# Altium PCB DragonFly-Controller.PcbDoc
Units mil, origin at the board's own origin, x right, y up, seen from the top; angles counter-clockwise.
Board outline 4921.26 x 2738.74 mil, 2 copper layers (Top Layer, Bottom Layer); 104 components, 70 nets, 329 pads, 9 vias.
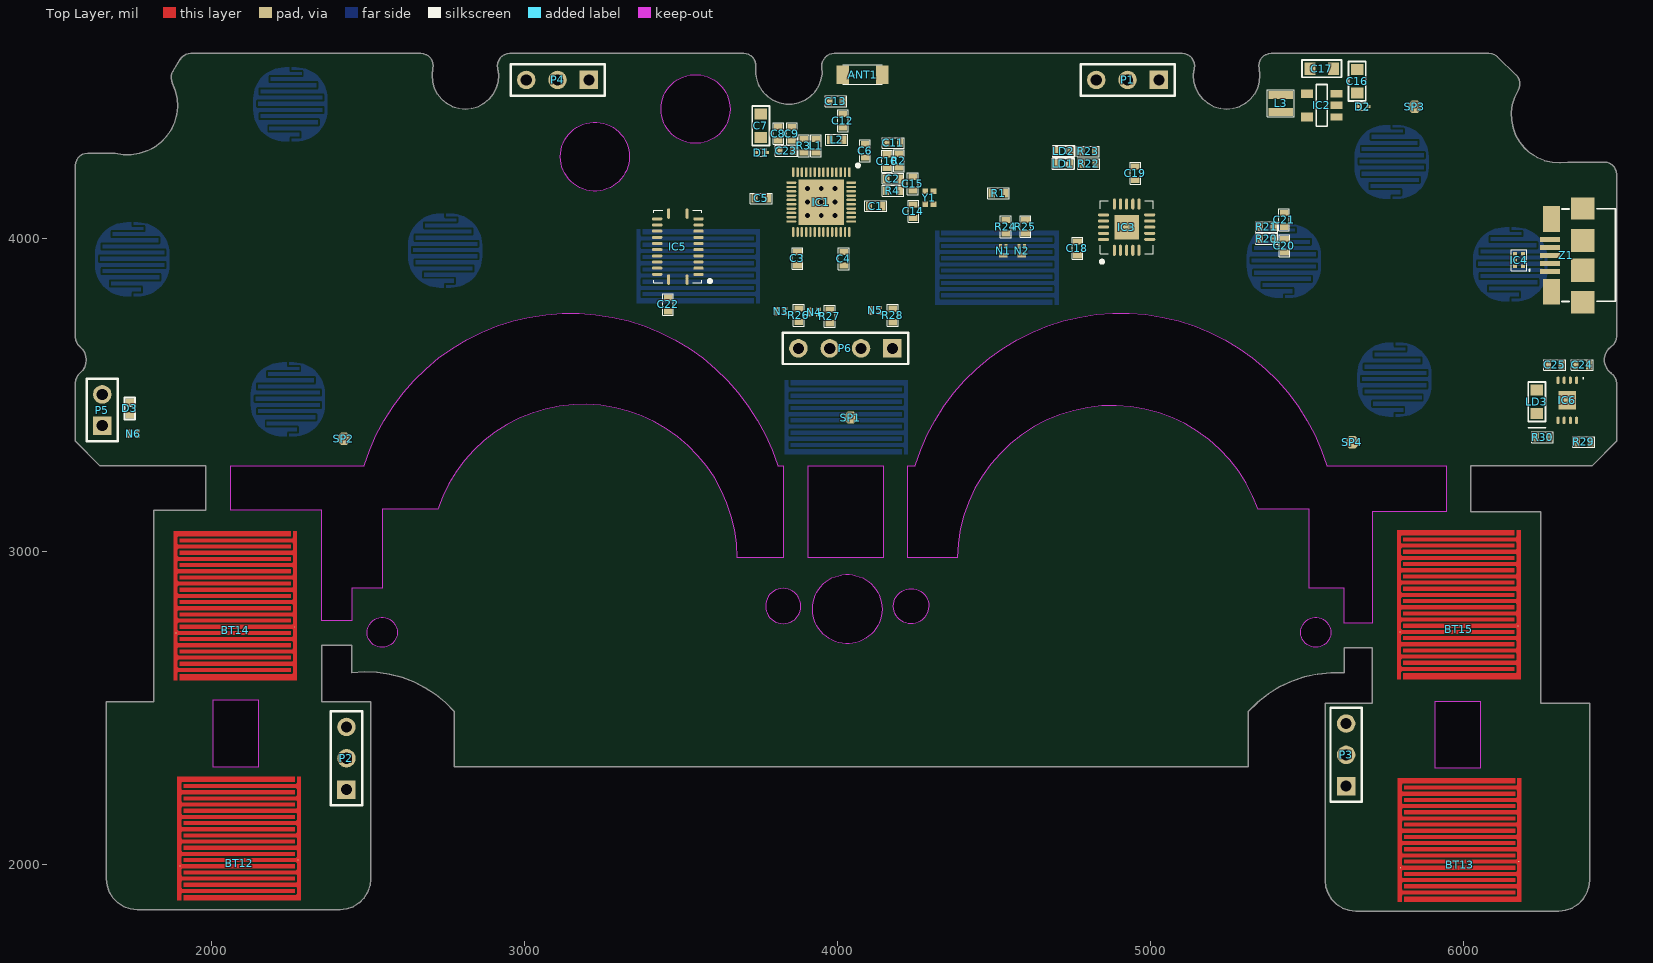
[diagram p0: Top Layer view]
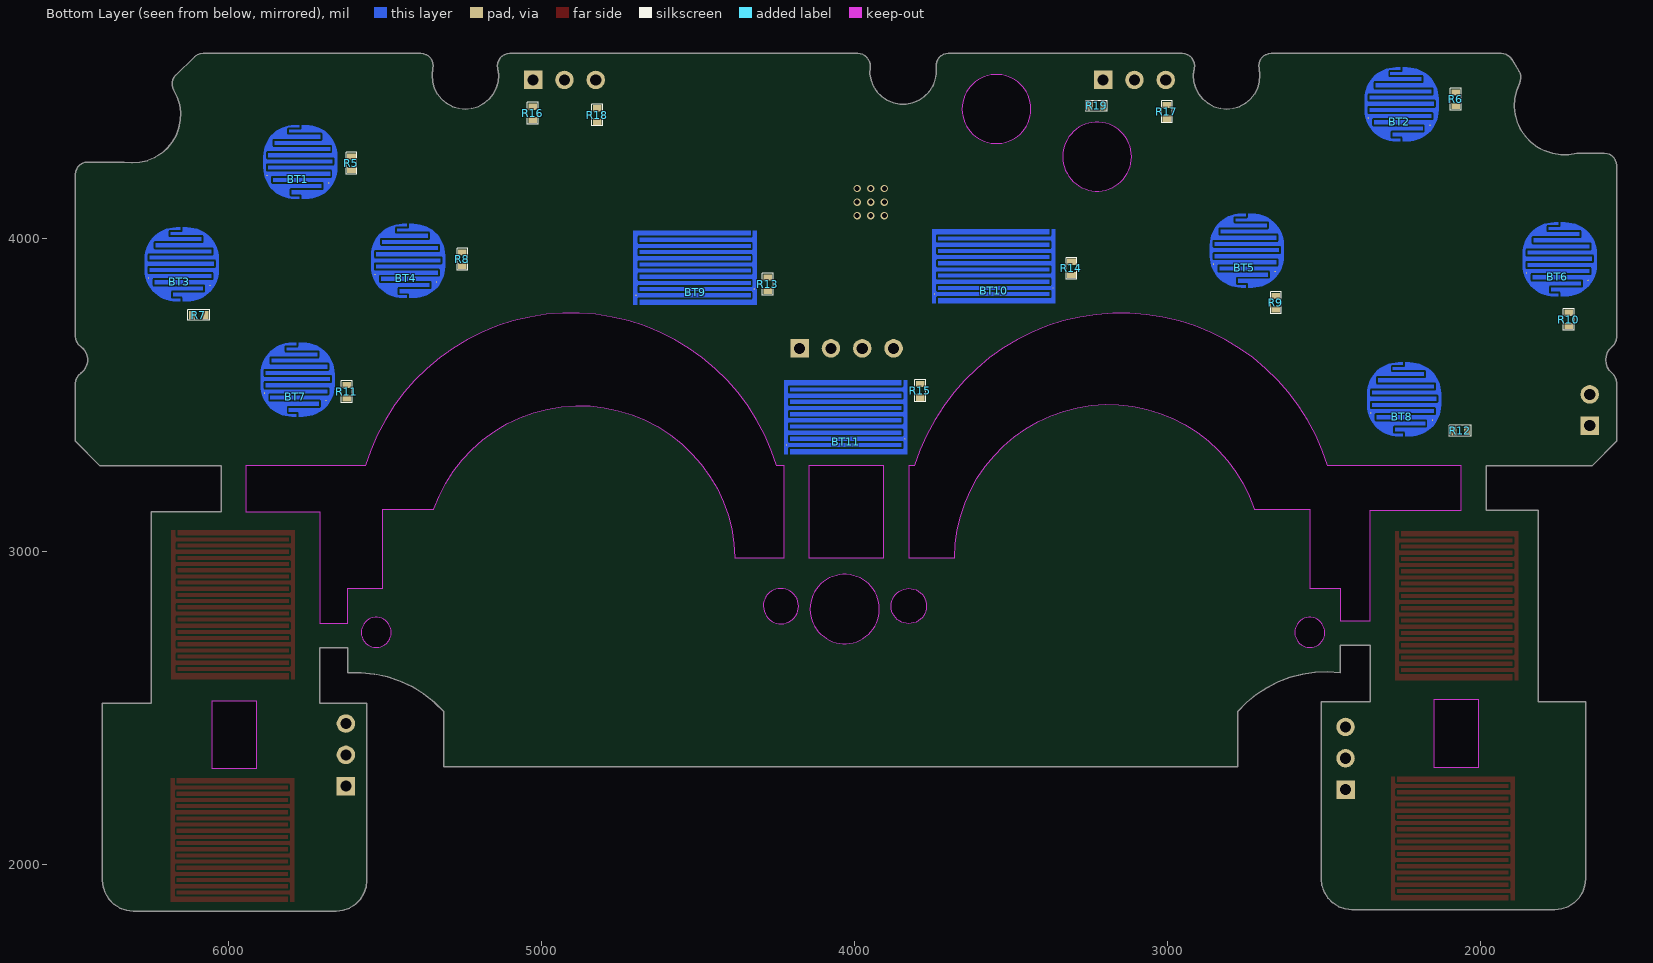
[diagram p1: Bottom Layer view, seen from below]

## Layer stack, top to bottom
Top Solder: solder mask 0.4, Solder Resist, Dk 3.5
Top Layer: signal copper 1.4
Dielectric 1: dielectric 12.6, FR-4, Dk 4.8
Bottom Layer: signal copper 1.4
Bottom Solder: solder mask 0.4, Solder Resist, Dk 3.5

## Board outline
1566.32,3538.23 1566.32,3351.49 1645.06,3272.75 1983.3,3272.75 1983.3,3131.51 1816.04,3131.51 1816.04,2519.2 1665.08,2519.2 1665.08,1954.21 1667.55,1932.31 1674.83,1911.51 1686.56,1892.85 1702.14,1877.26 1720.8,1865.54 1741.61,1858.26 1763.51,1855.79 2411.18,1855.79 2433.09,1858.26 2453.89,1865.54 2472.55,1877.26 2488.14,1892.85 2499.86,1911.51 2507.14,1932.31 2509.61,1954.21 2509.61,2519.2 2353.67,2519.2 2353.67,2699.23 2448.51,2699.23 2448.51,2612.09 2488.96,2614.97 2529.49,2613.46 2569.62,2607.59 2608.88,2597.42 2646.82,2583.07 2682.98,2564.71 2716.95,2542.55 2748.33,2516.85 2776.75,2487.92 2776.75,2311.82 5311.03,2311.82 5311.03,2487.92 5341.46,2517.99 5375.09,2544.44 5411.48,2566.94 5450.17,2585.2 5490.67,2598.99 5532.46,2608.14 5575.02,2612.52 5617.8,2612.09 5617.8,2691.33 5707.56,2691.33 5707.56,2514.51 5556.6,2514.51 5556.6,1949.52 5559.07,1927.62 5566.35,1906.82 5578.07,1888.15 5593.66,1872.57 5612.32,1860.84 5633.12,1853.56 5655.03,1851.1 6302.7,1851.1 6324.61,1853.56 6345.41,1860.84 6364.07,1872.57 6379.66,1888.15 6391.38,1906.82 6398.66,1927.62 6401.13,1949.52 6401.13,2514.51 6245.19,2514.51 6245.19,3126.82 6021.61,3126.82 6021.61,3272.75 6408.84,3272.75 6487.58,3351.49 6487.58,3535.73 6486.44,3545.13 6483.09,3553.98 6477.73,3561.78 6470.66,3568.08 6462.22,3575.39 6455.52,3584.32 6450.88,3594.48 6448.51,3605.39 6448.51,3616.56 6450.88,3627.47 6455.52,3637.63 6462.22,3646.56 6470.66,3653.87 6477.73,3660.17 6483.09,3667.97 6486.44,3676.82 6487.58,3686.22 6487.58,4203.57 6486.59,4212.33 6483.68,4220.65 6478.99,4228.11 6472.76,4234.35 6465.29,4239.04 6456.97,4241.95 6448.21,4242.94 6331.76,4242.94 6306.86,4240.46 6281.88,4242.07 6257.51,4247.73 6234.38,4257.3 6213.12,4270.5 6194.3,4287 6178.42,4306.34 6165.91,4328.02 6157.1,4351.44 6152.23,4375.99 6151.42,4401 6154.71,4425.81 6162,4449.76 6173.09,4472.19 6176.75,4480.18 6178.54,4488.77 6178.38,4497.56 6176.29,4506.09 6172.35,4513.94 6166.77,4520.72 6107.01,4578.72 6098.94,4584.75 6089.59,4588.54 6079.59,4589.83 5384.28,4589.83 5375.52,4588.85 5367.19,4585.93 5359.72,4581.24 5353.49,4575 5348.8,4567.52 5345.89,4559.2 5344.91,4550.43 5345.91,4541.67 5348.56,4520.67 5346.99,4499.57 5341.28,4479.2 5331.64,4460.36 5318.45,4443.81 5302.25,4430.21 5283.67,4420.08 5263.45,4413.84 5242.4,4411.73 5221.34,4413.84 5201.12,4420.08 5182.54,4430.21 5166.34,4443.81 5153.16,4460.36 5143.51,4479.2 5137.8,4499.57 5136.24,4520.67 5138.89,4541.67 5139.88,4550.43 5138.9,4559.2 5135.99,4567.52 5131.3,4575 5125.07,4581.24 5117.6,4585.93 5109.28,4588.85 5100.51,4589.83 3989.42,4589.83 3981.17,4588.96 3973.3,4586.38 3966.13,4582.21 3960,4576.63 3955.18,4569.89 3951.87,4562.29 3950.22,4554.17 3950.32,4545.88 3950.68,4524.84 3946.89,4504.13 3939.09,4484.58 3927.59,4466.95 3912.84,4451.94 3895.41,4440.13 3876,4431.99 3855.37,4427.84 3834.32,4427.84 3813.68,4431.99 3794.27,4440.13 3776.85,4451.94 3762.09,4466.95 3750.59,4484.58 3742.79,4504.13 3739,4524.84 3739.37,4545.88 3739.46,4554.17 3737.82,4562.29 3734.51,4569.89 3729.68,4576.63 3723.55,4582.21 3716.38,4586.38 3708.51,4588.96 3700.26,4589.83 2953.39,4589.83 2944.62,4588.85 2936.3,4585.93 2928.83,4581.24 2922.6,4575 2917.91,4567.52 2915,4559.2 2914.02,4550.43 2915.01,4541.67 2917.67,4520.67 2916.1,4499.57 2910.39,4479.2 2900.74,4460.36 2887.56,4443.81 2871.36,4430.21 2852.78,4420.08 2832.56,4413.84 2811.5,4411.73 2790.45,4413.84 2770.23,4420.08 2751.65,4430.21 2735.45,4443.81 2722.26,4460.36 2712.62,4479.2 2706.91,4499.57 2705.34,4520.67 2707.99,4541.67 2708.99,4550.43 2708.01,4559.2 2705.1,4567.52 2700.41,4575 2694.18,4581.24 2686.71,4585.93 2678.39,4588.85 2669.62,4589.83 1934.94,4589.83 1927,4589.02 1919.38,4586.63 1912.4,4582.75 1906.35,4577.54 1901.48,4571.21 1878.11,4533.52 1874.61,4526.34 1872.63,4518.61 1872.26,4510.64 1873.49,4502.76 1876.29,4495.28 1885.87,4471.2 1891.41,4445.88 1892.75,4419.99 1889.86,4394.23 1882.82,4369.29 1871.81,4345.82 1857.14,4324.45 1839.18,4305.76 1818.42,4290.24 1795.42,4278.3 1770.78,4270.26 1745.15,4266.33 1719.24,4266.63 1693.71,4271.14 1605.69,4271.14 1596.93,4270.15 1588.61,4267.24 1581.14,4262.55 1574.91,4256.32 1570.22,4248.85 1567.31,4240.53 1566.32,4231.77 1566.32,3683.72 1567.29,3675.04 1570.15,3666.78 1574.76,3659.36 1580.9,3653.14 1589.35,3644.56 1595.71,3634.33 1599.66,3622.95 1600.99,3610.98 1599.66,3599 1595.71,3587.62 1589.35,3577.39 1580.9,3568.81 1574.76,3562.59 1570.15,3555.17 1567.29,3546.92
cut-out: 3808.28,3272.75 3826.93,3272.75 3826.93,2980.09 3679.82,2980.09 3677.59,3024.61 3671.32,3068.74 3661.09,3112.13 3646.96,3154.4 3629.06,3195.22 3607.53,3234.25 3582.55,3271.17 3554.33,3305.67 3523.1,3337.47 3489.11,3366.32 3452.65,3391.96 3414.02,3414.19 3373.53,3432.82 3331.51,3447.71 3288.32,3458.73 3244.31,3465.79 3199.84,3468.83 3155.28,3467.83 3110.99,3462.79 3067.34,3453.76 3024.69,3440.81 2983.39,3424.05 2943.78,3403.61 2906.18,3379.67 2870.91,3352.41 2838.25,3322.07 2808.48,3288.9 2781.84,3253.16 2758.55,3215.16 2738.8,3175.2 2722.75,3133.62 2545.91,3133.62 2545.91,2882 2448.51,2882 2448.51,2777.97 2353.67,2777.97 2353.67,3131.51 2062.04,3131.51 2062.04,3272.75 2488.37,3272.75 2505.93,3323.02 2527.32,3371.79 2552.4,3418.77 2581.03,3463.68 2613.04,3506.24 2648.23,3546.21 2686.4,3583.35 2727.32,3617.43 2770.75,3648.26 2816.42,3675.65 2864.07,3699.44 2913.41,3719.48 2964.14,3735.66 3015.98,3747.88 3068.6,3756.07 3121.7,3760.17 3174.95,3760.17 3228.05,3756.07 3280.67,3747.88 3332.51,3735.66 3383.24,3719.48 3432.58,3699.44 3480.23,3675.65 3525.9,3648.26 3569.33,3617.43 3610.25,3583.35 3648.42,3546.21 3683.61,3506.24 3715.62,3463.68 3744.25,3418.77 3769.33,3371.79 3790.72,3323.02
cut-out: 5562.04,3272.75 5942.87,3272.75 5942.87,3126.82 5707.56,3126.82 5707.56,2770.07 5617.8,2770.07 5617.8,2882 5506.71,2882 5506.71,3133.62 5343.25,3133.62 5326.11,3176.21 5305.1,3217.03 5280.39,3255.72 5252.2,3291.96 5220.77,3325.43 5186.37,3355.83 5149.3,3382.92 5109.88,3406.45 5068.45,3426.23 5025.36,3442.08 4980.99,3453.86 4935.71,3461.48 4889.93,3464.86 4844.02,3463.99 4798.4,3458.86 4753.45,3449.52 4709.56,3436.06 4667.1,3418.58 4626.45,3397.24 4587.96,3372.22 4551.95,3343.74 4518.74,3312.04 4488.6,3277.4 4461.82,3240.12 4438.6,3200.51 4419.16,3158.92 4403.66,3115.71 4392.23,3071.24 4384.98,3025.91 4381.96,2980.09 4224.07,2980.09 4224.07,3272.75 4248.16,3272.75 4265.45,3322.99 4286.58,3371.74 4311.41,3418.71 4339.81,3463.62 4371.59,3506.2 4406.58,3546.19 4444.55,3583.36 4485.29,3617.47 4528.54,3648.33 4574.06,3675.75 4621.56,3699.56 4670.75,3719.63 4721.36,3735.83 4773.06,3748.07 4825.56,3756.27 4878.53,3760.38 4931.67,3760.38 4984.64,3756.27 5037.14,3748.07 5088.85,3735.83 5139.45,3719.63 5188.65,3699.56 5236.15,3675.75 5281.66,3648.33 5324.91,3617.47 5365.65,3583.36 5403.62,3546.19 5438.61,3506.2 5470.39,3463.62 5498.79,3418.71 5523.63,3371.74 5544.75,3322.99
cut-out: 3905.67,3272.75 4145.33,3272.75 4145.33,2980.09 3905.67,2980.09
cut-out: 2150,2525.18 2150,2310.82 2006.22,2310.82 2006.22,2525.18
cut-out: 5909,2306.63 5909,2521 6052.78,2521 6052.78,2306.63
cut-out: 3115,4260 cw(c3225,4260.11) 3335,4260 cw(c3225,4260)
cut-out: 3436.57,4412.13 cw(c3546.57,4412.24) 3656.57,4412.13 cw(c3546.57,4412.13)
cut-out: 5478.89,2740 cw(c5526.89,2740.99) 5574.89,2740 cw(c5526.89,2740.97)
cut-out: 2498,2740 cw(c2546,2740.99) 2594,2740 cw(c2546,2740.97)
cut-out: 3770,2825 ccw(c3826.51,2825.49) 3883,2824 ccw(c3826.5,2824.87)
cut-out: 3920,2815 cw(c4031,2815.16) 4142,2815 cw(c4031,2815.99)
cut-out: 4178.15,2824.71 cw(c4234.65,2824.58) 4291.15,2823.71 cw(c4234.66,2825.2)

## Design rules (kind name [scope] priority, off if disabled: settings)
Clearance [All] p1: gap=3.5 ignorepadtopadclearanceinfootprint=FALSE
DiffPairsRouting [All] p1: maxlimit=10 minlimit=10 mostfreqgap=10 toplayer_minwidth=15 toplayer_maxwidth=15 toplayer_prefwidth=15 bottomlayer_minwidth=15 bottomlayer_maxwidth=15 bottomlayer_prefwidth=15 maxuncoupledlength=500
PlaneConnect [All] p1: planeconnectstyle=Direct reliefexpansion=20 reliefentries=4 reliefconductorwidth=10 reliefairgap=10
PolygonConnect [All] p1: connectstyle=Direct reliefconductorwidth=10 reliefentries=4 polygonreliefangle="90 Angle" airgapwidth=10
RoutingVias [All] p1: holewidth=11.81 width=19.68 viastyle="Through Hole" minholewidth=7.87 minwidth=15.75 maxholewidth=196.85 maxwidth=236.22
SolderMaskExpansion [All] p1: expansion=4
Width [All] p1: maxlimit=200 minlimit=3.5 preferedwidth=5
28 further rules are at their usual default settings.

## Classes and differential pairs
net class UART: U0RXD U0TXD
component class "[06] - Multiplexer": C22 IC5
component class "[05] - Motor and LEDs": D3 N3 N4 N5 N6 P5 P6 R26 R27 R28
component class "[04] - USB": C18 C19 C20 C21 IC3 IC4 LD1 LD2 N1 N2 R20 R21 R22 R23 R24 R25 Z1
component class "[03] - Power": C16 C17 C24 C25 D2 IC2 IC6 L3 LD3 R29 R30 SP3 SP4
component class "[02] - Buttons": BT1 BT2 BT3 BT4 BT5 BT6 BT7 BT8 BT9 BT10 BT11 BT12 BT13 BT14 BT15 P1 P2 P3 P4 R5 R6 R7 R8 R9 R10 R11 R12 R13 R14 R15 R16 R17 R18 R19
component class "[01] - MCU": ANT1 C1 C2 C3 C4 C5 C6 C7 C8 C9 C10 C11 C12 C13 C14 C15 C23 D1 IC1 L1 L2 R1 R2 R3 R4 SP1 SP2 Y1
differential pair D: +D_P -D_N

## Components (designator, comment, footprint, x,y, rotation, side; value= is the part's Value field where it differs from the comment)
ANT1 "2.4 GHz Ant" 2450AT18A100E 4080,4522 r0 top
BT1 "" PCB_button_6mm_round 5769,4243 r180 bottom
BT2 "" PCB_button_6mm_round 2253,4427 r180 bottom
BT3 "" PCB_button_6mm_round 6148,3916 r180 bottom
BT4 "" PCB_button_6mm_round 5425,3927 r180 bottom
BT5 "" PCB_button_6mm_round 2747,3960 r180 bottom
BT6 "" PCB_button_6mm_round 1748,3932 r180 bottom
BT7 "" PCB_button_6mm_round 5778,3548 r180 bottom
BT8 "" PCB_button_6mm_round 2245,3485 r180 bottom
BT9 "" PCB_button_10x6mm_rect 4509,3906 r180 bottom
BT10 "" PCB_button_10x6mm_rect 3555,3910 r180 bottom
BT11 "" PCB_button_10x6mm_rect 4028,3428 r180 bottom
BT12 "" PCB_button_10x10mm_rect 2089,2083 r0 top
BT13 "" PCB_button_10x10mm_rect 5986,2078 r0 top
BT14 "" PCB_BUTTON_12X10MM_RECT 2077,2828 r0 top
BT15 "" PCB_BUTTON_12X10MM_RECT 5984,2831 r0 top
C1 "Capacitor" "0402 - Capacitor" 4122,4102 r0 top value=100p
C2 "Capacitor" "0402 - Capacitor" 4177,4190 r0 top value=1u
C3 "Capacitor" "0402 - Capacitor" 3872,3935 r270 top value=0.1u
C4 "Capacitor" "0402 - Capacitor" 4020,3934 r270 top value=0.1u
C5 "Capacitor" "0402 - Capacitor" 3756,4127 r180 top value=1u
C6 "Capacitor" "0402 - Capacitor" 4088,4279 r90 top value=0.1u
C7 "Capacitor" "0603 - Capacitor" 3755,4359 r270 top value=10u
C8 "Capacitor" "0402 - Capacitor" 3811,4334 r90 top value=1u
C9 "Capacitor" "0402 - Capacitor" 3854,4333 r90 top value=0.1u
C10 "Capacitor" "0402 - Capacitor" 4158,4246 r270 top value="3.3n 10%"
C11 "Capacitor" "0402 - Capacitor" 4178,4304 r0 top value="10n 10%"
C12 "Capacitor" "0402 - Capacitor" 4017,4375 r90 top value=4.7p
C13 "Capacitor" "0402 - Capacitor" 3995,4437 r180 top value=2.4p
C14 "Capacitor" "0402 - Capacitor" 4242,4086 r270 top value=22p
C15 "Capacitor" "0402 - Capacitor" 4240,4174 r90 top value=22p
C16 "Capacitor" "0603 - Capacitor" 5659,4501 r270 top value=4.7u
C17 "Capacitor" "0603 - Capacitor" 5546,4541 r180 top value=10u
C18 "Capacitor" "0402 - Capacitor" 4766,3967 r270 top value=1u
C19 "Capacitor" "0402 - Capacitor" 4951,4207 r90 top value=1u
C20 "Capacitor" "0402 - Capacitor" 5427,3976 r270 top value=47p
C21 "Capacitor" "0402 - Capacitor" 5426,4058 r90 top value=47p
C22 "Capacitor" "0402 - Capacitor" 3459,3788 r270 top value=100n
C23 "Capacitor" "0402 - Capacitor" 3836,4279 r180 top value=0.1u
C24 "Capacitor" "0402 - Capacitor" 6378,3595 r0 top value=4.7u
C25 "Capacitor" "0402 - Capacitor" 6290,3595 r180 top value=4.7u
D1 "Diode" "SOD 923" 3757,4273 r0 top
D2 "Diode" "SOD 923" 5677.46,4420 r180 top
D3 "Diode" "0402 - Led" 1740,3456 r270 top
IC1 "ESP32-D2WD" "ESP32 QFN35P500X500X90_HS-49N" 3948,4115 r270 top
IC2 "LM3671" "SOT 23 - 5" 5548,4424 r270 top
IC3 "FT231X" QFN20-127P600-8N 4923,4035 r90 top
IC4 "PRTR5V0U2F" SOT886 6176,3930 r180 top
IC5 "74HC4067" 74HC4067-QFN50P350X550X100_HS-25N 3490,3973 r180 top
IC6 "MCP73831T" QFN50P300X200X100_HS-9N 6330,3482 r270 top
L1 "Inductor" "0402 - inductor" 3931,4295 r90 top value=2n
L2 "Inductor" "0402 - inductor" 3997,4314 r180 top value=2.4n
L3 "Inductor" MDMK2020 5415,4430 r90 top value=2.2u
LD1 "Led" "0402 - Led" 4721,4237 r180 top
LD2 "Led" "0402 - Led" 4722,4277 r180 top
LD3 "Led" "0603 - led" 6233,3477 r270 top
N1 "N-MOSFET" DFN1006-3 4529,3959 r90 top
N2 "N-MOSFET" DFN1006-3 4588,3960 r90 top
N3 "N-MOSFET" DFN1006-3 3818,3767 r0 top
N4 "N-MOSFET" DFN1006-3 3926,3764 r0 top
N5 "N-MOSFET" DFN1006-3 4121,3769 r0 top
N6 "N-MOSFET" DFN1006-3 1751,3375 r0 top
P1 "Header 3" HDR1X3 5026,4505 r180 top
P2 "Header 3" HDR1X3 2432,2239 r90 top
P3 "Header 3" HDR1X3 5624,2250 r90 top
P4 "Header 3" HDR1X3 3206,4505 r180 top
P5 "Motor" HDR1X2 1652,3401 r90 top
P6 "RGB Led" HDR1X4 4175,3648 r180 top
R1 "Resistor" "0402 - Resistor" 4514,4143 r0 top value=499
R2 "Resistor" "0402 - Resistor" 4196,4247 r270 top value=20k
R3 "Resistor" "0402 - Resistor" 3892,4295 r90 top value=10k
R4 "Resistor" "0402 - Resistor" 4177,4151 r180 top value=0
R5 "Resistor" "0402 - Resistor" 5606,4239 r90 bottom value=1M
R6 "Resistor" "0402 - Resistor" 2080,4443 r270 bottom value=1M
R7 "Resistor" "0402 - Resistor" 6094,3754 r0 bottom value=1M
R8 "Resistor" "0402 - Resistor" 5252,3932 r90 bottom value=1M
R9 "Resistor" "0402 - Resistor" 2654,3794 r270 bottom value=1M
R10 "Resistor" "0402 - Resistor" 1719,3740 r270 bottom value=1M
R11 "Resistor" "0402 - Resistor" 5621,3509 r90 bottom value=1M
R12 "Resistor" "0402 - Resistor" 2066,3385 r0 bottom value=1M
R13 "Resistor" "0402 - Resistor" 4277,3853 r90 bottom value=1M
R14 "Resistor" "0402 - Resistor" 3307,3903 r90 bottom value=1M
R15 "Resistor" "0402 - Resistor" 3790,3512 r90 bottom value=1M
R16 "Resistor" "0402 - Resistor" 5027,4398 r90 bottom value=1M
R17 "Resistor" "0402 - Resistor" 3002,4403 r90 bottom value=1M
R18 "Resistor" "0402 - Resistor" 4821,4393 r270 bottom value=1M
R19 "Resistor" "0402 - Resistor" 3227,4422 r0 bottom value=1M
R20 "Resistor" "0402 - Resistor" 5371,3998 r0 top value=27
R21 "Resistor" "0402 - Resistor" 5371,4036 r0 top value=27
R22 "Resistor" "0402 - Resistor" 4802,4237 r0 top value=2k
R23 "Resistor" "0402 - Resistor" 4801,4277 r0 top value=2k
R24 "Resistor" "0402 - Resistor" 4537,4036 r90 top value=10k
R25 "Resistor" "0402 - Resistor" 4600,4037 r270 top value=10k
R26 "Resistor" "0402 - Resistor" 3876,3754 r270 top value=100
R27 "Resistor" "0402 - Resistor" 3975,3750 r270 top value=475
R28 "Resistor" "0402 - Resistor" 4176,3753 r270 top value=100
R29 "Resistor" "0402 - Resistor" 6382,3349 r0 top value=2k
R30 "Resistor" "0402 - Resistor" 6251,3364 r0 top value=1k
SP1 "Signal Point" Signal_point_1mm 4042,3427 r90 top value=DNP
SP2 "Signal Point" Signal_point_1mm 2424,3359 r90 top value=DNP
SP3 "Signal Point" Signal_point_1mm 5843,4419 r90 top value=DNP
SP4 "Signal Point" Signal_point_1mm 5644,3348 r90 top value=DNP
Y1 "XTAL_4" "XTAL 1.6X1.2MM 4-SMD" 4293,4129 r90 top value="40 MHz"
Z1 "USB MICROB" "USB - microB" 6380,3945 r90 top

## Footprints (in the part's own frame and the unit in brackets; to place one, negate y for a bottom-side part, rotate by r counter-clockwise, add the part's x,y. Pads: shape width x height; smd on the part's side, far side on the other; paste and mask are expansions set on the pad)
74HC4067-QFN50P350X550X100_HS-25N [mm] "QFN, 24-Leads, Body 3,50x5,50mm, Pitch 1,50mm/0,50mm, Thermal Pad 2,10x4,10mm, IPC Medium Density"
  oval 0.25x0.85 smd: 1(-0.75,2.675) 12(-0.75,-2.675) 13(0.75,-2.675) 24(0.75,2.675)
  oval 0.85x0.25 smd: 2(-1.675,2.25) 3(-1.675,1.75) 4(-1.675,1.25) 5(-1.675,0.75) 6(-1.675,0.25) 7(-1.675,-0.25) 8(-1.675,-0.75) 9(-1.675,-1.25) 10(-1.675,-1.75) 11(-1.675,-2.25) 14(1.675,-2.25) 15(1.675,-1.75) 16(1.675,-1.25) 17(1.675,-0.75) 18(1.675,-0.25) 19(1.675,0.25) 20(1.675,0.75) 21(1.675,1.25) 22(1.675,1.75) 23(1.675,2.25)
  silkscreen extent -2.73,-2.95 1.95,2.95, body extent -1.8,-2.8 1.81,2.81, height 1
"0402 - Capacitor" [mm]
  rect 0.5x0.7 smd: 1(0.55,0) 2(-0.55,0)
  silkscreen extent -0.89,-0.43 0.89,0.43, body extent -0.52,-0.27 0.53,0.28, height 0.55
"0402 - inductor" [mm]
  rect 0.5x0.7 smd: 1(0.55,0) 2(-0.55,0)
  silkscreen extent -0.89,-0.43 0.89,0.43, body extent -0.5,-0.3 0.5,0.3, height 0.2
"0402 - Led" [mm]
  rect 0.5x0.7 smd: 1(0.55,0) 2(-0.55,0)
  silkscreen extent -0.89,-0.43 0.89,0.43, body extent -0.5,-0.25 0.5,0.25, height 0.16
"0402 - Resistor" [mm]
  rect 0.5x0.7 smd: 1(0.55,0) 2(-0.55,0)
  silkscreen extent -0.89,-0.43 0.89,0.43, body extent -0.53,-0.28 0.53,0.28, height 0.4
"0603 - Capacitor" [mm]
  rect 0.9x1 smd: 1(-0.95,0) 2(0.95,0)
  silkscreen extent -1.6,-0.7 1.6,0.7, body extent -0.85,-0.45 0.85,0.45, height 0.9
"0603 - led" [mm]
  rect 0.9x1 smd: 1(-0.95,0) 2(0.95,0)
  silkscreen extent -1.6,-0.7 2.1,0.7, body extent -0.8,-0.39 0.8,0.39, height 0.7
2450AT18A100E [mm]
  rect 1x1.5 smd: 1(-1.6,0) 2(1.6,0)
  silkscreen extent -1.6,-0.8 1.6,0.8, body extent -1.8,-0.5 1.8,0.5, height 1
DFN1006-3 [mm]
  rect 0.4x0.25 smd: 1(0.35,0.225) 2(0.35,-0.225)
  rect 0.4x0.7 smd: 3(-0.35,0)
  body extent -0.52,-0.32 0.53,0.33, height 0.4
"ESP32 QFN35P500X500X90_HS-49N" [mm] "QFN, 48-Leads, Body 5,00x5,00mm, Pitch 0,35mm, Thermal Pad 3,70x3,70mm, IPC Medium Density"
  oval 0.8x0.2 smd: 1(-2.425,2.275) 2(-2.425,1.925) 3(-2.425,1.575) 4(-2.425,1.225) 5(-2.425,0.875) 6(-2.425,0.525) 7(-2.425,0.175) 8(-2.425,-0.175) 9(-2.425,-0.525) 10(-2.425,-0.875) 11(-2.425,-1.225) 12(-2.425,-1.575) 13(-2.425,-1.925) 14(-2.425,-2.275) 25(2.425,-2.275) 26(2.425,-1.925) 27(2.425,-1.575) 28(2.425,-1.225) 29(2.425,-0.875) 30(2.425,-0.525) 31(2.425,-0.175) 32(2.425,0.175) 33(2.425,0.525) 34(2.425,0.875) 35(2.425,1.225) 36(2.425,1.575) 37(2.425,1.925) 38(2.425,2.275)
  oval 0.2x0.8 smd: 15(-1.575,-2.425) 16(-1.225,-2.425) 17(-0.875,-2.425) 18(-0.525,-2.425) 19(-0.175,-2.425) 20(0.175,-2.425) 21(0.525,-2.425) 22(0.875,-2.425) 23(1.225,-2.425) 24(1.575,-2.425) 39(1.575,2.425) 40(1.225,2.425) 41(0.875,2.425) 42(0.525,2.425) 43(0.175,2.425) 44(-0.175,2.425) 45(-0.525,2.425) 46(-0.875,2.425) 47(-1.225,2.425) 48(-1.575,2.425)
  rect 3.7x3.7 smd paste-5: 49(0,0)
  silkscreen extent -3.1,2.85 -2.85,3.1, body extent -2.53,-2.53 2.53,2.53, height 0.9
HDR1X2 [mm] "Connector; Header; 2 Position"
  rect 1.5x1.5 hole 0.9: 1(0,0)
  round 1.5 hole 0.9: 2(2.54,0)
  silkscreen extent -1.27,-1.27 3.81,1.27
HDR1X3 [mm] "Connector; Header; 3 Position"
  rect 1.5x1.5 hole 0.9: 1(0,0)
  round 1.5 hole 0.9: 2(2.54,0) 3(5.08,0)
  silkscreen extent -1.27,-1.27 6.35,1.27
HDR1X4 [mm] "Connector; Header; 4 Position"
  rect 1.5x1.5 hole 0.9: 1(0,0)
  round 1.5 hole 0.9: 2(2.54,0) 3(5.08,0) 4(7.62,0)
  silkscreen extent -1.27,-1.27 8.89,1.27
MDMK2020 [mm] "Inductor"
  rect 0.65x2 smd: 1(-0.675,0) 2(0.675,0)
  silkscreen extent -1.09,-1.09 1.09,1.09, body extent -1,-1 1,1, height 1.2
PCB_button_6mm_round [mm]
  round 0.1 smd mask+0.05: 1(-2.7,-1.1) 2(2.3,-1.7)
  Top Layer region: -0.1,3 -0.46,3 -1.432,2.807 -2.256,2.256 -2.807,1.432 -3,0.46 -3,0.46 -3,-0.46 -2.807,-1.432 -2.256,-2.256 -1.432,-2.807 -0.46,-3 -0.46,-3 -0.1,-3 -0.1,-2.8 -0.8,-2.8 -0.9,-2.7 -0.9,-2.2 -0.8,-2.1 1.7,-2.1 1.7,-1.8 -2.3,-1.8 -2.4,-1.7 -2.4,-1.201 -2.3,-1.1 2.4,-1.1 2.4,-0.8 -2.7,-0.8 -2.8,-0.7 -2.8,-0.2 -2.7,-0.1 2.6,-0.1 2.6,0.2 -2.7,0.2 -2.8,0.3 -2.8,0.8 -2.7,0.9 2.4,0.9 2.4,1.2 -2.2,1.2 -2.3,1.3 -2.3,1.8 -2.2,1.9 1.6,1.9 1.6,2.2 -1,2.2 -1.1,2.3 -1.1,2.7 -1,2.8 -0.1,2.8
  Top Layer region: 0.1,3 0.46,3 1.432,2.807 2.256,2.256 2.807,1.432 3,0.46 3,0.46 3,-0.46 2.807,-1.432 2.256,-2.256 1.432,-2.807 0.46,-3 0.46,-3 0.1,-3 0.1,-2.7 0,-2.6 -0.7,-2.6 -0.7,-2.3 1.8,-2.3 1.9,-2.2 1.9,-1.7 1.8,-1.6 -2.2,-1.6 -2.2,-1.3 2.5,-1.3 2.6,-1.201 2.6,-0.7 2.5,-0.6 -2.6,-0.6 -2.6,-0.3 2.7,-0.3 2.8,-0.2 2.8,0.3 2.7,0.4 -2.6,0.4 -2.6,0.7 2.5,0.7 2.6,0.8 2.6,1.3 2.5,1.4 -2.1,1.4 -2.1,1.7 1.7,1.7 1.8,1.8 1.8,2.3 1.7,2.4 -0.9,2.4 -0.9,2.6 0,2.6 0.1,2.7
PCB_button_10x6mm_rect [mm]
  round 0.1 smd mask+0.05: 1(-4.8,-2.25) 2(4.8,-1.75)
  Top Layer region: -4.5,-3 -4.5,-2.6 4.6,-2.6 4.7,-2.5 4.7,-2 4.6,-1.9 -4.5,-1.9 -4.5,-1.6 4.6,-1.6 4.7,-1.5 4.7,-1 4.6,-0.9 -4.5,-0.9 -4.5,-0.6 4.6,-0.6 4.7,-0.5 4.7,0 4.6,0.1 -4.5,0.1 -4.5,0.4 4.6,0.4 4.7,0.5 4.7,1 4.6,1.1 -4.5,1.1 -4.5,1.4 4.6,1.4 4.7,1.5 4.7,2 4.6,2.1 -4.5,2.1 -4.5,2.4 4.6,2.4 4.7,2.5 4.7,3 5,3 5,-3
  Top Layer region: 4.5,3 -5,3 -5,-3 -4.7,-3 -4.7,-2.5 -4.6,-2.4 4.5,-2.4 4.5,-2.1 -4.6,-2.1 -4.7,-2 -4.7,-1.5 -4.6,-1.4 4.5,-1.4 4.5,-1.1 -4.6,-1.1 -4.7,-1 -4.7,-0.5 -4.6,-0.4 4.5,-0.4 4.5,-0.1 -4.6,-0.1 -4.7,0 -4.7,0.5 -4.6,0.6 4.5,0.6 4.5,0.9 -4.6,0.9 -4.7,1 -4.7,1.5 -4.6,1.6 4.5,1.6 4.5,1.9 -4.6,1.9 -4.7,2 -4.7,2.5 -4.6,2.6 4.5,2.6
PCB_button_10x10mm_rect [mm]
  round 0.1 smd mask+0.05: 1(-4.8,-2.25) 2(4.8,-1.75)
  Top Layer region: -5,0.9 -5,5 4.5,5 4.5,4.6 -4.6,4.6 -4.7,4.5 -4.7,4 -4.6,3.9 4.5,3.9 4.5,3.6 -4.6,3.6 -4.7,3.5 -4.7,3 -4.6,2.9 4.5,2.9 4.5,2.6 -4.6,2.6 -4.7,2.5 -4.7,2 -4.6,1.9 4.5,1.9 4.5,1.6 -4.6,1.6 -4.7,1.5 -4.7,1 -4.6,0.9
  Top Layer region: 4.7,1 4.6,1.1 -4.5,1.1 -4.5,1.4 4.6,1.4 4.7,1.5 4.7,2 4.6,2.1 -4.5,2.1 -4.5,2.4 4.6,2.4 4.7,2.5 4.7,3 4.6,3.1 -4.5,3.1 -4.5,3.4 4.6,3.4 4.7,3.5 4.7,4 4.6,4.1 -4.5,4.1 -4.5,4.4 4.6,4.4 4.7,4.5 4.7,5 5,5 5,1
  Top Layer region: 4.5,0.9 -5,0.9 -5,-5 -4.7,-5 -4.7,-4.5 -4.6,-4.4 4.5,-4.4 4.5,-4.1 -4.6,-4.1 -4.7,-4 -4.7,-3.5 -4.6,-3.4 4.5,-3.4 4.5,-3.1 -4.6,-3.1 -4.7,-3 -4.7,-2.5 -4.6,-2.4 4.5,-2.4 4.5,-2.1 -4.6,-2.1 -4.7,-2 -4.7,-1.5 -4.6,-1.4 4.5,-1.4 4.5,-1.1 -4.6,-1.1 -4.7,-1 -4.7,-0.5 -4.6,-0.4 4.5,-0.4 4.5,-0.1 -4.6,-0.1 -4.7,0 -4.7,0.5 -4.6,0.6 4.5,0.6
  Top Layer region: -4.5,-5 -4.5,-4.6 4.6,-4.6 4.7,-4.5 4.7,-4 4.6,-3.9 -4.5,-3.9 -4.5,-3.6 4.6,-3.6 4.7,-3.5 4.7,-3 4.6,-2.9 -4.5,-2.9 -4.5,-2.6 4.6,-2.6 4.7,-2.5 4.7,-2 4.6,-1.9 -4.5,-1.9 -4.5,-1.6 4.6,-1.6 4.7,-1.5 4.7,-1 4.6,-0.9 -4.5,-0.9 -4.5,-0.6 4.6,-0.6 4.7,-0.5 4.7,0 4.6,0.1 -4.5,0.1 -4.5,0.4 4.6,0.4 4.7,0.5 4.7,1 5,1 5,-5
PCB_BUTTON_12X10MM_RECT [mil]
  round 3.94 smd mask+1.97: 1(-189,-89) 2(189,-70)
  Top Layer region: -177.17,-153.54 -177.17,-141.73 181.1,-141.73 185.04,-137.8 185.04,-118.11 181.1,-114.17 -177.17,-114.17 -177.17,-102.36 181.1,-102.36 185.04,-98.43 185.04,-78.74 181.1,-74.8 -177.17,-74.8 -177.17,-62.99 181.1,-62.99 185.04,-59.06 185.04,-39.37 181.1,-35.43 -177.17,-35.43 -177.17,-23.62 181.1,-23.62 185.04,-19.69 185.04,0 181.1,3.94 -177.17,3.94 -177.17,15.75 181.1,15.75 185.04,19.68 185.04,39.37 181.1,43.31 -177.17,43.31 -177.17,55.12 181.1,55.12 185.04,59.06 185.04,78.74 196.85,78.74 196.85,-153.54
  Top Layer region: 177.17,74.8 -196.85,74.8 -196.85,-157.48 -185.04,-157.48 -185.04,-137.8 -181.1,-133.86 177.17,-133.86 177.17,-122.05 -181.1,-122.05 -185.04,-118.11 -185.04,-98.43 -181.1,-94.49 177.17,-94.49 177.17,-82.68 -181.1,-82.68 -185.04,-78.74 -185.04,-59.06 -181.1,-55.12 177.17,-55.12 177.17,-43.31 -181.1,-43.31 -185.04,-39.37 -185.04,-19.69 -181.1,-15.75 177.17,-15.75 177.17,-3.94 -181.1,-3.94 -185.04,0 -185.04,19.68 -181.1,23.62 177.17,23.62 177.17,35.43 -181.1,35.43 -185.04,39.37 -185.04,59.06 -181.1,62.99 177.17,62.99
  Top Layer region: 185.04,78.74 181.1,82.68 -177.17,82.68 -177.17,94.49 181.1,94.49 185.04,98.43 185.04,118.11 181.1,122.05 -177.17,122.05 -177.17,133.86 181.1,133.86 185.04,137.8 185.04,157.48 181.1,161.42 -177.17,161.42 -177.17,173.23 181.1,173.23 185.04,177.17 185.04,196.85 181.1,200.79 -177.17,200.79 -177.17,212.6 181.1,212.6 185.04,216.54 185.04,236.22 196.85,236.22 196.85,78.74
  Top Layer region: -196.85,74.8 -196.85,236.22 177.17,236.22 177.17,220.47 -181.1,220.47 -185.04,216.54 -185.04,196.85 -181.1,192.91 177.17,192.91 177.17,181.1 -181.1,181.1 -185.04,177.17 -185.04,157.48 -181.1,153.54 177.17,153.54 177.17,141.73 -181.1,141.73 -185.04,137.8 -185.04,118.11 -181.1,114.17 177.17,114.17 177.17,102.36 -181.1,102.36 -185.04,98.43 -185.04,78.74 -181.1,74.8
  Top Layer region: 181.1,-153.54 185.04,-157.48 185.04,-177.17 181.1,-181.1 -177.17,-181.1 -177.17,-192.91 181.1,-192.91 185.04,-196.85 185.04,-216.54 181.1,-220.47 -177.17,-220.47 -177.17,-240.16 196.85,-240.16 196.85,-153.54
  Top Layer region: -196.85,-157.48 -196.85,-240.16 -185.04,-240.16 -185.04,-216.54 -181.1,-212.6 177.17,-212.6 177.17,-200.79 -181.1,-200.79 -185.04,-196.85 -185.04,-177.17 -181.1,-173.23 177.17,-173.23 177.17,-161.42 -181.1,-161.42 -185.04,-157.48
QFN20-127P600-8N [mm]
  oval 0.9x0.25 smd: 1(-1.875,1) 2(-1.875,0.5) 3(-1.875,0) 4(-1.875,-0.5) 5(-1.875,-1) 11(1.875,-1) 12(1.875,-0.5) 13(1.875,0) 14(1.875,0.5) 15(1.875,1)
  oval 0.25x0.9 smd: 6(-1,-1.875) 7(-0.5,-1.875) 8(0,-1.875) 9(0.5,-1.875) 10(1,-1.875) 16(1,1.875) 17(0.5,1.875) 18(0,1.875) 19(-0.5,1.875) 20(-1,1.875)
  rect 1.98x1.98 smd paste-0.5: 21(0,0)
  silkscreen extent -2.92,-2.15 2.15,2.15, body extent -2,-2 2.01,2.01, height 0.8
QFN50P300X200X100_HS-9N [mm] "QFN, 8-Leads, Body 3,00x2,00mm, Pitch 0,50mm, Thermal Pad 1,63x1,43mm, IPC Medium Density"
  oval 0.6x0.25 smd: 1(1.625,-0.75) 2(1.625,-0.25) 3(-1.625,-0.25) 3(-1.625,-0.75) 4(-1.625,0.75) 4(-1.625,0.25) 5(1.625,0.75) NC(1.625,0.25)
  rect 1.5x1.4 smd: 2(0,0)
  silkscreen extent -1.85,1.25 -1.75,1.35, body extent -1.5,-1 1.51,1, height 1
Signal_point_1mm [mm]
  oct 1x1 smd paste-1: 0(0,0)
"SOD 923" [mm]
  rect 0.36x0.25 smd mask+0.05: 1(-0.42,0) 2(0.42,0)
  silkscreen extent -0.4,-0.3 0.4,0.3, body extent -0.43,-0.33 0.43,0.33, height 0.39
SOT886 [mm]
  rect 0.325x0.27 smd mask+0.05: 1(-0.337,0.5) 2(-0.337,0) 3(-0.337,-0.5) 4(0.337,-0.5) 5(0.337,0) 6(0.337,0.5)
  silkscreen extent -0.92,-0.85 0.63,0.9, body extent -0.63,-0.85 0.63,0.85, height 0.5
"SOT 23 - 5" [mm]
  rect 0.6x1 smd: 1(0.95,1.15) 2(0,1.15) 3(-0.95,1.15)
  rect 0.7x1 smd: 4(-0.95,-1.25) 5(0.95,-1.25)
  silkscreen extent -1.7,-0.5 1.7,0.4, body extent -1.5,-1.65 1.5,1.55, height 0.92
"USB - microB" [mm]
  rect 0.4x1.6 smd: 1(-1.3,2.675) 2(-0.65,2.675) 3(0,2.675) 4(0.65,2.675) 5(1.3,2.675)
  rect 1.8x1.9 smd: 5(-3.8,0) 5(3.8,0)
  rect 2.1x1.35 smd: 5(-2.95,2.55) 5(2.95,2.55)
  rect 1.9x1.9 smd: 5(-1.2,0) 5(1.2,0)
  silkscreen extent -3.73,-2.64 3.78,1.7, body extent -3.99,-2.69 3.99,2.73, height 2.93
"XTAL 1.6X1.2MM 4-SMD" [mm]
  rect 0.45x0.45 smd: 1(-0.54,0.34) 2(0.54,-0.34) 3(0.54,0.34) 4(-0.54,-0.34)
  body extent -0.8,-0.6 0.8,0.6, height 0.35

## Part data
ANT1: "2.4GHz Chip RF Antenna 2.4GHz"
BT1 BT2 BT3 BT4 BT5 BT6 BT7 BT8 BT9 BT10 BT11 BT12 BT13 BT14 BT15: library part "PCB button"
IC6: library part "Lipo Charger", "MCP73831T-2ACI/OTCT-ND", DigiKey Part #=MCP73831T-2ACI/MCCT-ND
LD1: Color=RX
LD2: Color=TX
LD3: Color=Red, Vf=1.9V
P1 P2 P3 P4: "Header, 3-Pin", LatestRevisionDate=17-Jul-2002, LatestRevisionNote="Re-released for DXP Platform.", Publisher="Altium Limited"
P5: library part "Header 2", "Header, 2-Pin", LatestRevisionDate=17-Jul-2002, LatestRevisionNote="Re-released for DXP Platform.", Publisher="Altium Limited"
P6: library part "Header 4", "Header, 4-Pin", DigiKey Part #=1830-1015-ND, LatestRevisionDate=17-Jul-2002, LatestRevisionNote="Re-released for DXP Platform.", Publisher="Altium Limited"
Z1: library part "USB - microB", "609-4613-1-ND", DigiKey Part #=609-4613-1-ND
D1: DigiKey Part #=ESD9X5.0ST5GOSCT-ND
IC1: DigiKey Part #=1904-1005-1-ND
IC2: DigiKey Part #=LM3671MF-3.3/NOPBCT-ND
IC3: DigiKey Part #=768-1128-1-ND
IC4: DigiKey Part #=1727-4161-6-ND
IC5: DigiKey Part #=1727-6606-1-ND
Y1: DigiKey Part #=535-13987-1-ND

## Via types
v1: diameter 23.62, hole 15.75, Top Layer to Bottom Layer, tented bottom, 9 vias

## Nets (pads, with @x,y where several pads share a name; then routed paths per layer and width w, separated by ;. In a path a pad name is that pad's centre, name@x,y a point inside that pad or via, vN(x,y) a via of type N, cw(c..) or ccw(c..) an arc to the next point about the centre after c; other vN are vias at no path point)
B_ANALOG: BT11.2 IC5.3 R15.2
B_DOWN: BT7.2 IC5.6 R11.2
B_L1: IC5.18 P1.1 R16.1
B_L2: IC5.17 P1.3 R18.2
B_LEFT: BT3.2 IC5.8 R7.2
B_O: BT6.2 IC5.22 R10.2
B_R1: IC5.20 P4.3 R17.1
B_R2: IC5.19 P4.1 R19.2
B_RIGHT: BT4.2 IC5.7 R8.2
B_S_0: IC1.22 IC5.10
B_S_1: IC1.24 IC5.11
B_S_2: IC1.34 IC5.14
B_S_3: IC1.25 IC5.13
B_SELECT: BT9.2 IC5.5 R13.2
B_SQUARE: BT5.2 IC5.23 R9.2
B_START: BT10.2 IC5.4 R14.2
B_TRIANGLE: BT2.2 IC5.2 R6.2
B_UP: BT1.2 IC5.9 R5.2
B_X: BT8.2 IC5.21 R12.2
B_Z: IC1.36 IC5.1
CAP1: C10.2 C11.2 IC1.48 R2.2
CAP2: C10.1 IC1.47 R2.1
CHIP_PU: C23.2 IC1.9 N1.3 R3.2
D_N: C20.2 IC4.1 IC4.6 R20.1 Z1.2
D_P: C21.2 IC4.3 IC4.4 R21.1 Z1.3
DTR: IC3.18 N2.1 R24.1
GND: C1.1 C2.1 C3.1 C4.1 C5.1 C6.1 C7.1 C8.1 C9.1 C11.1 C13.1 C14.1 C15.1 C16.1 C17.1 C18.1 C19.1 C20.1 C21.1 C22.1 C23.1 C24.1 C25.1 D1.1 D2.1 IC1.49 IC2.2 IC3.3 IC3.13 IC3.21 IC4.2 IC5.12 IC5.15 IC5.16 IC6.2 L2.1 N6.1 P6.2 R5.1 R6.1 R7.1 R8.1 R9.1 R10.1 R11.1 R12.1 R13.1 R14.1 R15.1 R16.2 R17.2 R18.1 R19.1 R29.1 SP1.0 SP2.0 SP4.0 Y1.3 Y1.4 Z1.5
  other v1: 3904.69,4071.69 3948,4071.69 3991.31,4071.69 3904.69,4115 3948,4115 3991.31,4115 3904.69,4158.31 3948,4158.31 3991.31,4158.31
GPIO0: IC1.23 N2.3
LED_B: IC1.35 N3.2
LED_G: IC1.42 N5.2
LED_R: IC1.38 N4.2
LNA_IN: C12.2 IC1.2 L2.2
NetANT1_1: ANT1.1 C12.1 C13.2
NetBT12_1: BT12.1 P2.3
NetBT12_2: BT12.2 BT14.2 P2.2
NetBT13_1: BT13.1 BT15.1 P3.2
NetBT13_2: BT13.2 P3.1
NetBT14_1: BT14.1 P2.1
NetBT15_2: BT15.2 P3.3
NetC15_2: C15.2 R4.2 Y1.2
NetD3_1: D3.1 N6.3 P5.1
NetIC1_40: IC1.40 R1.2
NetIC2_5: IC2.5 L3.1
NetIC3_7: IC3.7 R23.1
NetIC3_8: IC3.8 R21.2
NetIC3_9: IC3.9 R20.2
NetIC3_14: IC3.14 R22.1
NetIC6_1: IC6.1 R30.1
NetIC6_5: IC6.5 R29.2
NetLD1_2: LD1.2 R22.2
NetLD2_2: LD2.2 R23.2
NetLD3_2: LD3.2 R30.2
NetN1_2: N1.2 R24.2
NetN2_2: N2.2 R25.2
NetN3_1: N3.1 R26.2
NetN4_1: N4.1 R27.2
NetN5_1: N5.1 R28.2
NetP6_1: P6.1 R28.1
NetP6_3: P6.3 R27.1
NetP6_4: P6.4 R26.1
PWM_MOTOR: IC1.39 N6.2
RTS: IC3.19 N1.1 R25.1
U0RXD: IC3.17 R1.1
U0TXD: IC1.41 IC3.1
VBAT: C16.2 C25.2 D2.2 D3.2 IC2.1 IC2.3 IC6.3 N3.3 N4.3 N5.3 P5.2 SP3.0
VBUS: C19.2 C24.2 IC3.11 IC3.12 IC4.5 IC6.4 LD3.1 Z1.1
VDD3P3: IC1.3 IC1.4 L1.2
VDD3P3_CPU: BT1.1 BT2.1 BT3.1 BT4.1 BT5.1 BT6.1 BT7.1 BT8.1 BT9.1 BT10.1 BT11.1 C1.2 C2.2 C3.2 C4.2 C5.2 C6.2 C7.2 C8.2 C9.2 C17.2 C18.2 C22.2 D1.2 IC1.1 IC1.18 IC1.19 IC1.26 IC1.37 IC1.43 IC1.46 IC2.4 IC3.10 IC3.20 IC5.24 L1.1 L3.2 LD1.1 LD2.1 P1.2 P4.2 R3.1
XTAL_N: C14.2 IC1.44 Y1.1
XTAL_P: IC1.45 R4.1
pads on no net: ANT1.2 IC1.5 IC1.6 IC1.7 IC1.8 IC1.10 IC1.11 IC1.12 IC1.13 IC1.14 IC1.15 IC1.16 IC1.17 IC1.20 IC1.21 IC1.27 IC1.28 IC1.29 IC1.30 IC1.31 IC1.32 IC1.33 IC3.2 IC3.4 IC3.5 IC3.6 IC3.15 IC3.16 IC6.NC Z1.4